# Altium PCB Плата верхняя версия 7 длинная.PcbDoc
Units mm, origin at the board's own origin, x right, y up, seen from the top; angles counter-clockwise.
Board outline 160 x 100 mm, 2 copper layers (Top Layer, Bottom Layer), stack 1.569 mm thick; 118 components, 166 nets, 806 pads, 0 vias.
Unrouted connection lines stored in the file: 550.
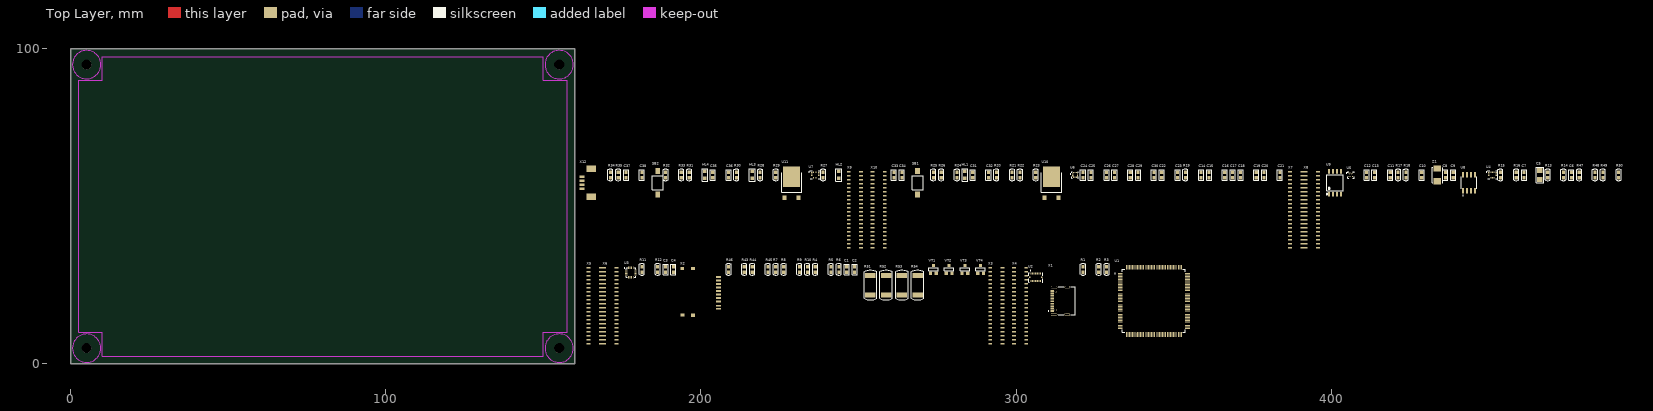
[diagram p0: Top Layer view]
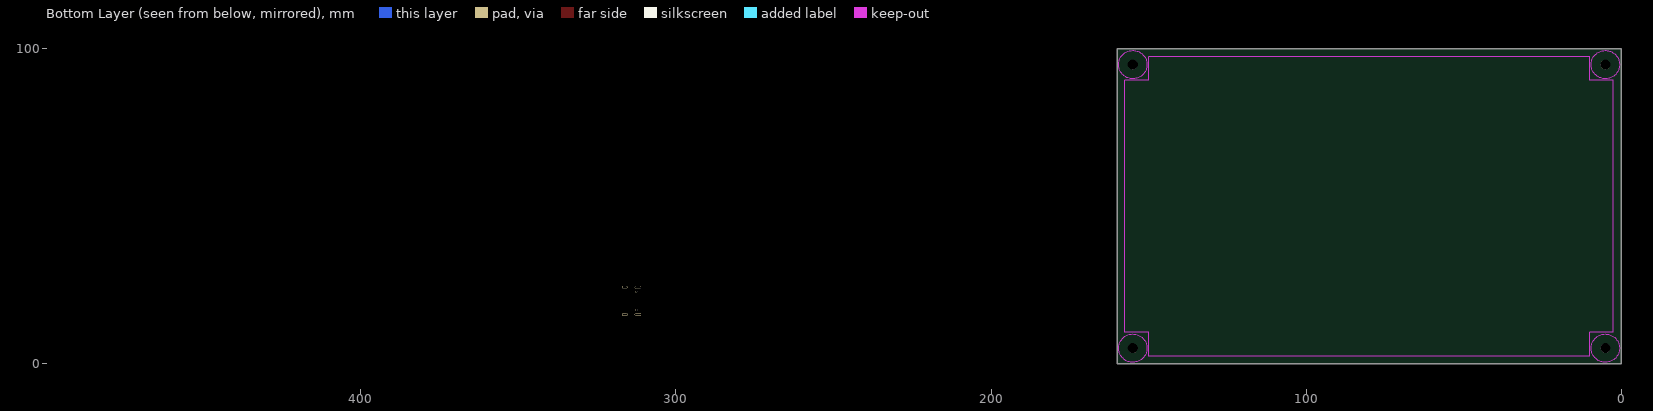
[diagram p1: Bottom Layer view, seen from below]

## Layer stack, top to bottom
Top Solder: solder mask 0.01, Solder Resist, Dk 3.5
Top Layer: signal copper 0.035
Dielectric 1: core 1.4986, Core-043, Dk 4.3
Bottom Layer: signal copper 0.035
Bottom Solder: solder mask 0.01, Solder Resist, Dk 3.5

## Board outline
0,0 0,100 160,100 160,0

## Design rules (kind name [scope] priority, off if disabled: settings)
Clearance [All] p1: gap=0.254 ignorepadtopadclearanceinfootprint=FALSE except(0: Arc-Hole Track-Hole SMDPad-Hole THPad-Hole Via-Hole Fill-Hole Poly-Hole Region-Hole Text-Hole)
PolygonConnect [All] p1: connectstyle=Relief reliefconductorwidth=0.254 reliefentries=4 polygonreliefangle="90 Angle" airgapwidth=0.254
RoutingVias [All] p1: holewidth=0.711 width=1.27 viastyle="Through Hole" minholewidth=0.711 minwidth=1.27 maxholewidth=0.711 maxwidth=1.27
SolderMaskExpansion [All] p1: expansion=0.102 istentingtop=FALSE
Width [All] p1: maxlimit=0.254 minlimit=0.254 preferedwidth=0.254
30 further rules are at their usual default settings.

## Components (designator, comment, footprint, x,y, rotation, side; value= is the part's Value field where it differs from the comment)
C1 "100nF" C0603 246.25,30 r90 top
C2 "100nF" C0603 248.75,30 r90 top
C3 "100nF" C0603 188.75,30 r90 top
C4 "100nF" C0603 191.25,30 r90 top
C5 "4u7F" C1206 466.25,60 r90 top
C6 "100nF" C0603 476.25,60 r90 top
C7 "200nF" C0603 461.25,60 r90 top
C8 "18pF" C0603 436.25,60 r90 top
C9 "18pF" C0603 438.75,60 r90 top
C10 "47nF" C0603 428.75,60 r90 top
C11 "100nF" C0603 418.75,60 r90 top
C12 "100nF" C0603 411.25,60 r90 top
C13 "100nF" C0603 413.75,60 r90 top
C14 "100nF" C0603 358.75,60 r90 top
C15 "100nF" C0603 361.25,60 r90 top
C16 "100nF" C0603 366.25,60 r90 top
C17 "100nF" C0603 368.75,60 r90 top
C18 "100nF" C0603 371.25,60 r90 top
C19 "100nf" C0603 376.25,60 r90 top
C20 "100nF" C0603 378.75,60 r90 top
C21 "100nF" C0603 383.75,60 r90 top
C22 "100nF" C0603 346.25,60 r90 top
C23 "100nF" C0603 351.25,60 r90 top
C24 "100nF" C0603 321.25,60 r90 top
C25 "100nF" C0603 323.75,60 r90 top
C26 "100nF" C0603 328.75,60 r90 top
C27 "100nF" C0603 331.25,60 r90 top
C28 "100nF" C0603 336.25,60 r90 top
C29 "100nF" C0603 338.75,60 r90 top
C30 "100nF" C0603 343.75,60 r90 top
C31 "1uF" C0603 286.25,60 r90 top
C32 "1uF" C0603 291.25,60 r90 top
C33 "100nF" C0603 261.25,60 r90 top
C34 "C1_POSTOYANNYJ" C0603 263.75,60 r90 top
C35 "1uF" C0603 203.75,60 r90 top
C36 "1uF" C0603 208.75,60 r90 top
C37 "C1_POSTOYANNYJ" C0603 176.25,60 r90 top
C38 "100nF" C0603 181.25,60 r90 top
HL1 "t" LD0805 283.75,60 r90 top
HL2 "t" LD0805 243.75,60 r90 top
HL3 "t" LD0805 216.25,60 r90 top
HL4 "t" LD0805 201.25,60 r90 top
R1 "5K1" R0603 321.25,30 r90 top
R2 "100" R0603 326.25,30 r90 top
R3 "100" R0603 328.75,30 r90 top
R4 "100" R0603 236.25,30 r90 top
R5 "100" R0603 241.25,30 r90 top
R6 "5K1" R0603 243.75,30 r90 top
R7 "0" R0603 223.75,30 r90 top
R8 "0" R0603 226.25,30 r90 top
R9 "0" R0603 231.25,30 r90 top
R10 "0" R0603 233.75,30 r90 top
R11 "100K" R0603 181.25,30 r90 top
R12 "100K" R0603 186.25,30 r90 top
R13 "100K" R0603 468.75,60 r90 top
R14 "100K" R0603 473.75,60 r90 top
R15 "10K" R0603 453.75,60 r90 top
R16 "10K" R0603 458.75,60 r90 top
R17 "60" R0603 421.25,60 r90 top
R18 "60" R0603 423.75,60 r90 top
R19 "0" R0603 353.75,60 r90 top
R20 "0" R0603 293.75,60 r90 top
R21 "0" R0603 298.75,60 r90 top
R22 "0" R0603 301.25,60 r90 top
R23 "0" R0603 306.25,60 r90 top
R24 "100" R0603 281.25,60 r90 top
R25 "10K" R0603 273.75,60 r90 top
R26 "10K" R0603 276.25,60 r90 top
R27 "100" R0603 238.75,60 r90 top
R28 "0" R0603 218.75,60 r90 top
R29 "0" R0603 223.75,60 r90 top
R30 "100" R0603 211.25,60 r90 top
R31 "100" R0603 196.25,60 r90 top
R32 "10K" R0603 188.75,60 r90 top
R33 "10K" R0603 193.75,60 r90 top
R34 "0" R0603 171.25,60 r90 top
R35 "0" R0603 173.75,60 r90 top
R43 "10K" R0603 213.75,30 r90 top
R44 "10K" R0603 216.25,30 r90 top
R45 "10K" R0603 221.25,30 r90 top
R46 "10K" R0603 208.75,30 r90 top
R47 "NCP15XH103F03RC" R0603 478.75,60 r90 top
R48 "NCP15XH103F03RC" R0603 483.75,60 r90 top
R49 "NCP15XH103F03RC" R0603 486.25,60 r90 top
R50 "NCP15XH103F03RC" R0603 491.25,60 r90 top
R51 "0020ab 1K8 2512" R2512 253.75,25 r90 top
R52 "0020ab 1K8 2512" R2512 258.75,25 r90 top
R53 "0020ab 1K8 2512" R2512 263.75,25 r90 top
R54 "0020ab 1K8 2512" R2512 268.75,25 r90 top
SB1 "Text" DTSM-32 268.75,57.5 r0 top
SB2 "Text" DTSM-32 186.25,57.5 r0 top
U1 "K1921BK01T2" QFP50P2200X2200X160-144N 343.75,20 r0 top
U2 "BMI088" PQFN50P450X300X100-16N 306.25,27.5 r0 top
U3 "QMC5883L" PLCC16-0.5-3X3MM 176.25,27.5 r0 top
U4 "QMI8658" XDCR_BMI270 451.25,60 r0 top
U5 "BMM150" XDCR_BMM150 406.25,60 r0 top
U6 "BMP388" PQFN50P200X200X80-10N 318.75,60 r0 top
U7 "BMI270" XDCR_BMI270 236.25,60 r0 top
U8 "TJA1040T" SOIC127P600X175-8N 443.75,57.5 r90 top
U9 "W25Q128FVSIG" SOIC127P790X216-8N 401.25,57.5 r90 top
U10 "КФ1158Н" SOT-428 311.25,57.5 r0 top
U11 "КФ1158Н" SOT-428 228.75,57.5 r0 top
VT1 "КТ234В9" SOT-23 273.75,30 r0 top
VT2 "КТ234В9" SOT-23 278.75,30 r0 top
VT3 "MOSFET-N" SOT-23 283.75,30 r0 top
VT4 "КТ234В9" SOT-23 288.75,30 r0 top
X1 "TYPE-C-31-M-12" HRO_TYPE-C-31-M-12 316.25,20 r90 top
X2 "microSD" SD 201.25,22.5 r90 top
X3 "Header 2x20" PBD1.27-40SA 293.75,17.5 r0 top
X4 "Header 2x20" PBD1.27-40SA 301.25,17.5 r0 top
X5 "Header 2x20" PBD1.27-40SA 166.25,17.5 r0 top
X6 "Header 2x20" PBD1.27-40SA 171.25,17.5 r0 top
X7 "Header 2x20" "Headr 2x20 female" 388.75,50 r0 top
X8 "Header 2x20" "Headr 2x20 female" 393.75,50 r0 top
X9 "Header 2x20" "Headr 2x20 female" 248.75,50 r0 top
X10 "Header 2x20" "Headr 2x20 female" 256.25,50 r0 top
X12 "Header 1x4" "PicoBlade 4pin" 163.75,57.5 r90 top
Z1 "KSE-7I08000MAF343ZA3" XTAL_NX5032GA-8.000M-STD-CSU-1 433.75,60 r90 top

## Footprints (in the part's own frame and the unit in brackets; to place one, negate y for a bottom-side part, rotate by r counter-clockwise, add the part's x,y. Pads: shape width x height; smd on the part's side, far side on the other; paste and mask are expansions set on the pad)
C0603 [mm] "1608M"
  rect 1.1x1 smd: 1(-0.85,0) 2(0.85,0)
  silkscreen extent -1.7,-0.8 1.7,0.8, body extent -0.8,-0.4 0.8,0.4, height 0.91
C1206 [mm] "3216M"
  rect 1.6x1.8 smd: 1(-1.4,0) 2(1.4,0)
  silkscreen extent -2.5,-1.2 2.5,1.2, body extent -1.6,-0.8 1.6,0.8, height 1.01
DTSM-32 [mm] "1 contact, Surface, 0.05A, 250V, H=5mm"
  rect 1.5x2 smd: 1(0,3.75) 2(0,-3.75)
  silkscreen extent -1.75,-2.25 1.75,2.25, body extent -1.75,-4 1.75,4, height 5.5
"Headr 2x20 female" [mm]
  rect 1.2x0.45 smd: 1(-1.82,10.962) 2(2.08,10.962) 3(-1.82,9.692) 4(2.08,9.692) 5(-1.82,8.422) 6(2.08,8.422) 7(-1.82,7.152) 8(2.08,7.152) 9(-1.82,5.882) 10(2.08,5.882) 11(-1.82,4.612) 12(2.08,4.612) 13(-1.82,3.342) 14(2.08,3.342) 15(-1.82,2.072) 16(2.08,2.072) 17(-1.82,0.802) 18(2.08,0.802) 19(-1.82,-0.468) 20(2.08,-0.468) 21(-1.82,-1.738) 22(2.08,-1.738) 23(-1.82,-3.008) 24(2.08,-3.008) 25(-1.82,-4.278) 26(2.08,-4.278) 27(-1.82,-5.548) 28(2.08,-5.548) 29(-1.82,-6.818) 30(2.08,-6.818) 31(-1.82,-8.088) 32(2.08,-8.088) 33(-1.82,-9.358) 34(2.08,-9.358) 35(-1.82,-10.628) 36(2.08,-10.628) 37(-1.82,-11.898) 38(2.08,-11.898) 39(-1.82,-13.168) 40(2.08,-13.168)
HRO_TYPE-C-31-M-12 [mm]
  rect 0.6x1.14 smd mask+0.05: A1_B12(-3.2,4.75) A4_B9(-2.4,4.75) B1_A12(3.2,4.75) B4_A9(2.4,4.75)
  rect 0.3x1.14 smd mask+0.05: A5(-1.25,4.75) A6(-0.25,4.75) A7(0.25,4.75) A8(1.25,4.75) B5(1.75,4.75) B6(0.75,4.75) B7(-0.75,4.75) B8(-1.75,4.75)
  oval 0.9x2 hole 0.6 slot 1.7 at 90 deg: S1(-4.325,4.17) S2(4.325,4.17)
  oval 0.9x1.7 hole 0.6 slot 1.4 at 90 deg: S3(-4.325,0) S4(4.325,0)
  round 0.6 hole 0.6 unplated: ""(-2.89,3.68) ""(2.89,3.68)
  silkscreen extent -4.47,-2.6 4.47,6.1, body extent -4.47,-2.6 4.47,5.31, height 3.31
LD0805 [mm]
  rect 1.1x1.1 smd: 1(-1.1,0) 2(1.1,0)
  silkscreen extent -2,-0.9 2,0.9, body extent -1,-0.62 1,0.63, height 0.73
PBD1.27-40SA [mm]
  rect 1.2x0.45 smd: 1(-1.947,12.994) 2(1.953,12.994) 3(-1.947,11.724) 4(1.953,11.724) 5(-1.947,10.454) 6(1.953,10.454) 7(-1.947,9.184) 8(1.953,9.184) 9(-1.947,7.914) 10(1.953,7.914) 11(-1.947,6.644) 12(1.953,6.644) 13(-1.947,5.374) 14(1.953,5.374) 15(-1.947,4.104) 16(1.953,4.104) 17(-1.947,2.834) 18(1.953,2.834) 19(-1.947,1.564) 20(1.953,1.564) 21(-1.947,0.294) 22(1.953,0.294) 23(-1.947,-0.976) 24(1.953,-0.976) 25(-1.947,-2.246) 26(1.953,-2.246) 27(-1.947,-3.516) 28(1.953,-3.516) 29(-1.947,-4.786) 30(1.953,-4.786) 31(-1.947,-6.056) 32(1.953,-6.056) 33(-1.947,-7.326) 34(1.953,-7.326) 35(-1.947,-8.596) 36(1.953,-8.596) 37(-1.947,-9.866) 38(1.953,-9.866) 39(-1.947,-11.136) 40(1.953,-11.136)
"PicoBlade 4pin" [mm]
  rect 0.8x1.6 smd: 1(-1.84,1.525) 2(-0.59,1.525) 3(0.66,1.525) 4(1.91,1.525)
  rect 2.1x3 smd: S(-4.39,-1.375) S(4.46,-1.375)
PLCC16-0.5-3X3MM [mm]
  rect 0.7x0.3 smd: 1(0,2.25) 2(0,1.75) 3(0,1.25) 4(0,0.75) 9(3,0.75) 10(3,1.25) 11(3,1.75) 12(3,2.25)
  rect 0.3x0.7 smd: 5(0.75,0) 6(1.25,0) 7(1.75,0) 8(2.25,0) 13(2.25,3) 14(1.75,3) 15(1.25,3) 16(0.75,3)
  silkscreen extent -0.6,0 3,3
PQFN50P200X200X80-10N [mm]
  rrect9% 0.35x0.38 smd: 1(-0.765,0.25) 2(-0.765,-0.25) 3(-0.5,-0.765) 4(0,-0.765) 5(0.5,-0.765) 6(0.765,-0.25) 7(0.765,0.25) 8(0.5,0.765) 9(0,0.765) 10(-0.5,0.765)
  silkscreen extent -1.6,-1.03 1.03,1.03
PQFN50P450X300X100-16N [mm]
  rect 0.35x0.59 smd: 1(-1.5,1.165) 2(-1,1.165) 3(-0.5,1.165) 4(0,1.165) 5(0.5,1.165) 6(1,1.165) 7(1.5,1.165) 9(1.5,-1.165) 10(1,-1.165) 11(0.5,-1.165) 12(0,-1.165) 13(-0.5,-1.165) 14(-1,-1.165) 15(-1.5,-1.165)
  rect 0.59x0.35 smd: 8(1.915,0) 16(-1.915,0)
  silkscreen extent -2.25,-1.5 2.25,2.2
QFP50P2200X2200X160-144N [mm]
  rrect25% 1.47x0.28 smd: 1(-10.67,8.75) 2(-10.67,8.25) 3(-10.67,7.75) 4(-10.67,7.25) 5(-10.67,6.75) 6(-10.67,6.25) 7(-10.67,5.75) 8(-10.67,5.25) 9(-10.67,4.75) 10(-10.67,4.25) 11(-10.67,3.75) 12(-10.67,3.25) 13(-10.67,2.75) 14(-10.67,2.25) 15(-10.67,1.75) 16(-10.67,1.25) 17(-10.67,0.75) 18(-10.67,0.25) 19(-10.67,-0.25) 20(-10.67,-0.75) 21(-10.67,-1.25) 22(-10.67,-1.75) 23(-10.67,-2.25) 24(-10.67,-2.75) 25(-10.67,-3.25) 26(-10.67,-3.75) 27(-10.67,-4.25) 28(-10.67,-4.75) 29(-10.67,-5.25) 30(-10.67,-5.75) 31(-10.67,-6.25) 32(-10.67,-6.75) 33(-10.67,-7.25) 34(-10.67,-7.75) 35(-10.67,-8.25) 36(-10.67,-8.75) 73(10.67,-8.75) 74(10.67,-8.25) 75(10.67,-7.75) 76(10.67,-7.25) 77(10.67,-6.75) 78(10.67,-6.25) 79(10.67,-5.75) 80(10.67,-5.25) 81(10.67,-4.75) 82(10.67,-4.25) 83(10.67,-3.75) 84(10.67,-3.25) 85(10.67,-2.75) 86(10.67,-2.25) 87(10.67,-1.75) 88(10.67,-1.25) 89(10.67,-0.75) 90(10.67,-0.25) 91(10.67,0.25) 92(10.67,0.75) 93(10.67,1.25) 94(10.67,1.75) 95(10.67,2.25) 96(10.67,2.75) 97(10.67,3.25) 98(10.67,3.75) 99(10.67,4.25) 100(10.67,4.75) 101(10.67,5.25) 102(10.67,5.75) 103(10.67,6.25) 104(10.67,6.75) 105(10.67,7.25) 106(10.67,7.75) 107(10.67,8.25) 108(10.67,8.75)
  rrect25% 0.28x1.47 smd: 37(-8.75,-10.67) 38(-8.25,-10.67) 39(-7.75,-10.67) 40(-7.25,-10.67) 41(-6.75,-10.67) 42(-6.25,-10.67) 43(-5.75,-10.67) 44(-5.25,-10.67) 45(-4.75,-10.67) 46(-4.25,-10.67) 47(-3.75,-10.67) 48(-3.25,-10.67) 49(-2.75,-10.67) 50(-2.25,-10.67) 51(-1.75,-10.67) 52(-1.25,-10.67) 53(-0.75,-10.67) 54(-0.25,-10.67) 55(0.25,-10.67) 56(0.75,-10.67) 57(1.25,-10.67) 58(1.75,-10.67) 59(2.25,-10.67) 60(2.75,-10.67) 61(3.25,-10.67) 62(3.75,-10.67) 63(4.25,-10.67) 64(4.75,-10.67) 65(5.25,-10.67) 66(5.75,-10.67) 67(6.25,-10.67) 68(6.75,-10.67) 69(7.25,-10.67) 70(7.75,-10.67) 71(8.25,-10.67) 72(8.75,-10.67) 109(8.75,10.67) 110(8.25,10.67) 111(7.75,10.67) 112(7.25,10.67) 113(6.75,10.67) 114(6.25,10.67) 115(5.75,10.67) 116(5.25,10.67) 117(4.75,10.67) 118(4.25,10.67) 119(3.75,10.67) 120(3.25,10.67) 121(2.75,10.67) 122(2.25,10.67) 123(1.75,10.67) 124(1.25,10.67) 125(0.75,10.67) 126(0.25,10.67) 127(-0.25,10.67) 128(-0.75,10.67) 129(-1.25,10.67) 130(-1.75,10.67) 131(-2.25,10.67) 132(-2.75,10.67) 133(-3.25,10.67) 134(-3.75,10.67) 135(-4.25,10.67) 136(-4.75,10.67) 137(-5.25,10.67) 138(-5.75,10.67) 139(-6.25,10.67) 140(-6.75,10.67) 141(-7.25,10.67) 142(-7.75,10.67) 143(-8.25,10.67) 144(-8.75,10.67)
  silkscreen extent -12.44,-10 10,10
R0603 [mm] "1608M"
  rect 1.1x1 smd: 1(-0.85,0) 2(0.85,0)
  silkscreen extent -1.8,-0.8 1.8,0.8, body extent -0.8,-0.4 0.8,0.4, height 0.38
R2512 [mm] "6432M"
  rect 1.6x3.3 smd: 1(-3.1,0) 2(3.1,0)
  silkscreen extent -4.7,-2 4.7,2, body extent -3.2,-1.6 3.2,1.6, height 0.7
SD [mm]
  rect 0.5x1.47 smd: 1(-5,-4.325) 2(-4,-4.325)
  rect 0.7x1.47 smd: 3(-2.65,-4.325) 4(-1.55,-4.325) 5(-0.45,-4.325) 6(0.65,-4.325) 7(1.75,-4.325) 8(2.85,-4.325) 9(3.95,-4.325) CD(5.05,-4.325)
  rect 0.98x1.2 smd: S1(-7.05,3.8) S2(7.8,3.8) S3(7.725,7.225) S4(-7,7.15)
SOIC127P600X175-8N [mm]
  rect 1.75x0.59 smd: 1(-2.585,1.905) 2(-2.585,0.635) 3(-2.585,-0.635) 4(-2.585,-1.905) 5(2.585,-1.905) 6(2.585,-0.635) 7(2.585,0.635) 8(2.585,1.905)
  silkscreen extent -4.1,-2.52 1.95,2.52, body extent -3,-2.45 3,2.45, height 1.75
SOIC127P790X216-8N [mm]
  oval 1.6x0.6 smd: 1(-3.6,1.905) 2(-3.6,0.635) 3(-3.6,-0.635) 4(-3.6,-1.905) 5(3.6,-1.905) 6(3.6,-0.635) 7(3.6,0.635) 8(3.6,1.905)
  silkscreen extent -3.82,-2.65 2.47,2.82
SOT-23 [mm] "КТ-46"
  rect 1x1 smd: 1(-0.9,-1.2) 2(0,1.2) 3(0.9,-1.2)
  silkscreen extent -1.5,-0.5 1.5,0.5, body extent -1.5,-1.15 1.5,1.15, height 1.11
SOT-428 [mm] "КТ-89, DPAK, TO-252"
  rect 1.2x1.5 smd: 1(-2.222,-4.763) 3(2.222,-4.763)
  rect 5.5x6.5 smd: 2(0,1.905)
  silkscreen extent -3.17,-3 3.17,3.17, body extent -3.25,-5.28 3.25,4.86, height 2.43
XDCR_BMI270 [mm]
  rect 0.475x0.25 smd: 1(-1.162,0.75) 2(-1.162,0.25) 3(-1.162,-0.25) 4(-1.162,-0.75) 8(1.162,-0.75) 9(1.162,-0.25) 10(1.162,0.25) 11(1.162,0.75)
  rect 0.25x0.475 smd: 5(-0.5,-0.913) 6(0,-0.913) 7(0.5,-0.913) 12(0.5,0.913) 13(0,0.913) 14(-0.5,0.913)
  silkscreen extent -2.07,-1.25 1.5,1.25, body extent -1.5,-1.25 1.5,1.25, height 0.87
XDCR_BMM150 [mm]
  round 0.2 smd: A1(-0.601,0.601) A3(-0.035,0.601) A5(0.531,0.601) B2(-0.318,0.318) B4(0.248,0.318) C1(-0.601,0.035) C5(0.531,0.035) D2(-0.318,-0.248) D4(0.248,-0.248) E1(-0.601,-0.531) E3(-0.035,-0.531) E5(0.531,-0.531)
  silkscreen extent -1.37,-1.02 1.02,1.02
XTAL_NX5032GA-8.000M-STD-CSU-1 [mm]
  rect 2x2.4 smd: 1(-2,0) 2(2,0)
  silkscreen extent -2.5,-1.6 2.5,1.6, body extent -2.5,-1.6 2.5,1.6, height 1.5

## Part data
C1 C2 C3 C4 C5 C6 C7 C8 C9 C10 C11 C12 C13 C14 C15 C16 C17 C18 C19 C20 C21 C22 C23 C24 C25 C26 C27 C28 C29 C30 C31 C32 C33 C35 C36 C38: library part C1_POSTOYANNYJ, "Конденсатор постоянной емкости"
C34 C37: "Конденсатор постоянной емкости"
HL1 HL2 HL3 HL4: library part Led-1, Published=03.12.2013, Publisher="Andrew Danich", Type="Индикатор единичный"
R1 R2 R3 R4 R5 R6 R7 R8 R9 R10 R11 R12 R13 R14 R15 R16 R17 R18 R19 R20 R21 R22 R23 R24 R25 R26 R27 R28 R29 R30 R31 R32 R33 R34 R35: library part R1_POSTOYANNYJ, "Резистор постоянный", Simulation ModelName=Resistors, Simulation PortMap=(1:1),(2:2)
R43 R44 R45 R46: library part Resistor, Published=24.03.2010, Publisher="Andrew Danich", Type=Резистор
R47 R48 R49 R50 R51 R52 R53 R54: library part Resistor_0,25W, Published=19.09.2014, Publisher="Andrew Danich", Type=Резистор
SB1 SB2: library part BT-01x-01p-LED, Published=17.04.2014, Publisher="Andrew Danich", Type=Переключатель
U1: "MCU"
U2 U4: "IMU"
U3 U5: "Compass"
U6: "Barometer"
U7: library part QMI8658, "IMU"
U8: "CAN-Transciever"
U9: "Memory 4MB"
U10 U11: "LDO"
VT1 VT2 VT4: library part MOSFET-N, Published=24.09.2010, Publisher="Andrew Danich", Type=Транзистор
X2: library part MICROSD, "Описание свойств компонента"
Z1: library part KX-38T
VT3: Published=24.09.2010, Publisher="Andrew Danich", Type=Транзистор

## Free pads (board coordinates)
  round 3 hole 3.2 unplated: MTH1(5,5) MTH2(5,95) MTH3(155,95) MTH4(155,5)

## Nets (pads, with @x,y where several pads share a name; then routed paths per layer and width w, separated by ;. In a path a pad name is that pad's centre, name@x,y a point inside that pad or via, vN(x,y) a via of type N, cw(c..) or ccw(c..) an arc to the next point about the centre after c; other vN are vias at no path point)
3V3: C6.1 C14.2 C15.2 C16.2 C17.2 C18.2 C19.2 C20.2 C21.1 C24.1 C25.1 C26.1 C27.1 C28.1 C29.1 C30.1 C36.2 R11.1 R12.1 R13.1 R14.2 R25.2 R26.2 R30.1 R32.2 R33.2 R43.2 R44.2 R45.2 R46.2 U1.6 U1.17 U1.30 U1.32 U1.33 U1.39 U1.52 U1.62 U1.72 U1.84 U1.95 U1.108 U1.121 U1.131 U1.144 U9.8 U11.3 X2.4 X3.9 X3.10 X6.31 X6.32 X7.9 X7.10 X10.31 X10.32 X12.1
3V3_SENSOR: C1.1 C2.1 C3.1 C4.1 C12.1 C13.1 C22.1 C23.1 C32.2 C33.1 C34.1 C37.1 C38.1 R15.1 R16.1 R31.1 U2.3 U2.11 U3.2 U3.13 U4.5 U4.8 U5.B2 U5.E5 U6.1 U6.10 U7.5 U7.8 U10.3
4V2: X3.11 X3.12 X3.13 X3.14 X6.27 X6.28 X6.29 X6.30 X7.11 X7.12 X7.13 X7.14 X10.27 X10.28 X10.29 X10.30
5V: C11.1 C31.2 C35.2 U8.3 U10.1 U11.1 X3.7 X3.8 X6.33 X6.34 X7.7 X7.8 X10.33 X10.34
GND: C1.2 C2.2 C3.2 C4.2 C5.1 C6.2 C8.1 C9.1 C10.1 C11.2 C12.2 C13.2 C14.1 C15.1 C16.1 C17.1 C18.1 C19.1 C20.1 C21.2 C22.2 C23.2 C24.2 C25.2 C26.2 C27.2 C28.2 C29.2 C30.2 C31.1 C32.1 C33.2 C34.2 C35.1 C36.1 C37.2 C38.2 HL1.2 HL2.2 HL3.2 HL4.2 R1.2 R6.2 R19.1 R28.1 R29.1 R34.1 R35.1 R47.2 R48.2 R49.2 R50.2 R51.2 R52.2 R53.2 R54.2 U1.16 U1.38 U1.51 U1.61 U1.83 U1.94 U1.107 U1.120 U1.130 U2.2 U2.4 U2.6 U2.7 U3.4 U3.9 U3.11 U4.6 U4.7 U5.A1 U5.C5 U5.E1 U5.E3 U6.3 U6.8 U6.9 U7.6 U7.7 U8.2 U8.8 U9.4 U10.2 U11.2 X1.A1_B12 X1.B1_A12 X2.6 X2.S1 X2.S2 X3.37 X3.38 X3.39 X3.40 X4.1 X4.2 X4.3 X4.4 X4.5 X4.6 X4.37 X4.38 X4.39 X4.40 X5.1 X5.2 X5.3 X5.4 X5.35 X5.36 X5.37 X5.38 X5.39 X5.40 X6.1 X6.2 X6.3 X6.4 X7.37 X7.38 X7.39 X7.40 X8.1 X8.2 X8.3 X8.4 X8.5 X8.6 X8.37 X8.38 X8.39 X8.40 X9.1 X9.2 X9.3 X9.4 X9.35 X9.36 X9.37 X9.38 X9.39 X9.40 X10.1 X10.2 X10.3 X10.4 X12.4
NetC5_2: C5.2 U3.10
NetC7_1: C7.1 U3.12
NetC7_2: C7.2 U3.8
NetC8_2: C8.2 U1.24 Z1.2
NetC9_2: C9.2 U1.23 Z1.1
NetC10_2: C10.2 R17.2 R18.1 U8.5
NetHL1_1: HL1.1 R24.2
NetHL2_1: HL2.1 R27.2
NetHL3_1: HL3.1 R30.2
NetHL4_1: HL4.1 R31.2
NetR1_1: R1.1 X1.A5
NetR2_1: R2.1 X1.A6
NetR2_2: R2.2 R5.2 U1.104
NetR3_1: R3.1 X1.A7
NetR3_2: R3.2 R4.2 U1.103
NetR4_1: R4.1 X1.B7
NetR5_1: R5.1 X1.B6
NetR6_1: R6.1 X1.B5
NetR7_1: R7.1 R9.2 R20.1 R22.2 U1.132 X6.24 X10.24
NetR7_2: R7.2 X3.36
NetR8_1: R8.1 X3.34
NetR8_2: R8.2 R10.2 R21.2 R23.2 U1.124 X6.22 X10.22
NetR9_1: R9.1 X3.32
NetR10_1: R10.1 X3.30
NetR11_2: R11.2 U1.98 X2.7
NetR12_2: R12.2 U1.100 X2.8
NetR13_2: R13.2 U1.112 X2.2
NetR14_1: R14.1 U1.101 X2.1
NetR15_2: R15.2 U1.11 U3.16 X5.11 X9.11
NetR16_2: R16.2 U1.10 U3.1 X5.9 X9.9
NetR17_1: R17.1 U8.7 X4.24 X8.24
NetR18_2: R18.2 U8.6 X4.26 X8.26
NetR19_2: R19.2 U1.31 X5.32 X9.32
NetR20_2: R20.2 X7.36
NetR21_1: R21.1 X7.34
NetR22_1: R22.1 X7.32
NetR23_1: R23.1 X7.30
NetR24_1: R24.1 U1.56
NetR25_1: R25.1 R28.2 SB1.1 U1.138
NetR26_1: R26.1 R29.2 SB1.2
NetR27_1: R27.1 U1.57
NetR32_1: R32.1 R34.2 SB2.1 U1.25
NetR33_1: R33.1 R35.2 SB2.2
NetR43_1: R43.1 R48.1 U1.50
NetR44_1: R44.1 R49.1 U1.49
NetR45_1: R45.1 R50.1 U1.22
NetR46_1: R46.1 R47.1 U1.53
NetR51_1: R51.1 VT1.2
NetR52_1: R52.1 VT2.2
NetR53_1: R53.1 VT3.2
NetR54_1: R54.1 VT4.2
NetU1_1: U1.1 X5.10 X9.10
NetU1_2: U1.2 X5.12 X9.12
NetU1_3: U1.3 X5.14 X9.14
NetU1_4: U1.4 X6.5 X10.5
NetU1_5: U1.5 X6.7 X10.7
NetU1_12: U1.12 X3.24 X7.24
NetU1_13: U1.13 X5.24 X9.24
NetU1_14: U1.14 X5.26 X9.26
NetU1_15: U1.15 X6.15 X10.15
NetU1_18: U1.18 X6.17 X10.17
NetU1_19: U1.19 X4.25 X8.25
NetU1_20: U1.20 X4.27 X8.27
NetU1_21: U1.21 X4.29 X8.29
NetU1_27: U1.27 X3.20 X7.20
NetU1_28: U1.28 X3.18 X7.18
NetU1_29: U1.29 X5.28 X9.28
NetU1_34: U1.34 X5.23 X9.23
NetU1_35: U1.35 X4.15 X8.15
NetU1_36: U1.36 X3.19 X7.19
NetU1_37: U1.37 X3.17 X7.17
NetU1_40: U1.40 U1.127 U2.14
NetU1_41: U1.41 U2.8 U4.13 U5.A3 U6.2 U7.13 X3.29 X7.29
NetU1_42: U1.42 X2.3
NetU1_43: U1.43 X4.17 X8.17
NetU1_44: U1.44 X5.30 X9.30
NetU1_46: U1.46 X4.19 X8.19
NetU1_47: U1.47 X4.21 X8.21
NetU1_48: U1.48 X2.5
NetU1_58: U1.58 X6.9 X10.9
NetU1_59: U1.59 X6.11 X10.11
NetU1_60: U1.60 X4.7 X8.7
NetU1_64: U1.64 X4.9 X8.9
NetU1_66: U1.66 X4.11 X8.11
NetU1_67: U1.67 X4.13 X8.13
NetU1_69: U1.69 X3.22 X7.22
NetU1_70: U1.70 X6.10 X10.10
NetU1_73: U1.73 U8.4
NetU1_74: U1.74 U8.1
NetU1_75: U1.75 X6.16 X10.16
NetU1_77: U1.77 X6.12 X10.12
NetU1_80: U1.80 X6.14 X10.14
NetU1_85: U1.85 U9.5
NetU1_86: U1.86 U9.2
NetU1_87: U1.87 VT1.3
NetU1_88: U1.88 VT2.3
NetU1_89: U1.89 VT3.3
NetU1_90: U1.90 VT4.3
NetU1_93: U1.93 U7.12
NetU1_109: U1.109 X12.2
NetU1_110: U1.110 X12.3
NetU1_111: U1.111 X5.25 X9.25
NetU1_113: U1.113 X4.30 X8.30
NetU1_114: U1.114 U9.3
NetU1_115: U1.115 U9.7
NetU1_116: U1.116 X4.28 X8.28
NetU1_117: U1.117 U9.6
NetU1_123: U1.123 U9.1
NetU1_125: U1.125 U6.6
NetU1_126: U1.126 U2.5
NetU1_128: U1.128 U4.12
NetU1_129: U1.129 U5.A5
NetU1_134: U1.134 U2.10 U2.15 U4.1 U5.C1 U6.5 U7.1 X3.25 X7.25
NetU1_135: U1.135 U2.9 U4.14 U5.B4 U6.4 U7.14 X3.27 X7.27
NetU1_136: U1.136 X5.29 X9.29
NetU1_137: U1.137 X5.27 X9.27
NetU1_139: U1.139 X4.23 X8.23
NetU1_140: U1.140 X4.31 X8.31
NetU1_141: U1.141 X5.6 X9.6
NetU1_142: U1.142 X5.8 X9.8
NetX3_15: X3.15 X7.15
NetX3_16: X3.16 X7.16
NetX3_21: X3.21 X7.21
NetX3_23: X3.23 X7.23
NetX3_26: X3.26 X7.26
NetX3_28: X3.28 X7.28
NetX3_31: X3.31 X7.31
NetX3_33: X3.33 X7.33
NetX4_20: X4.20 X8.20
NetX4_22: X4.22 X8.22
NetX4_32: X4.32 X8.32
NetX4_33: X4.33 X8.33
NetX4_34: X4.34 X8.34
NetX4_35: X4.35 X8.35
NetX4_36: X4.36 X8.36
NetX5_5: X5.5 X9.5
NetX5_7: X5.7 X9.7
NetX5_13: X5.13 X9.13
NetX5_15: X5.15 X9.15
NetX5_16: X5.16 X9.16
NetX5_17: X5.17 X9.17
NetX5_18: X5.18 X9.18
NetX5_19: X5.19 X9.19
NetX5_20: X5.20 X9.20
NetX5_21: X5.21 X9.21
NetX5_22: X5.22 X9.22
NetX5_31: X5.31 X9.31
NetX5_33: X5.33 X9.33
NetX5_34: X5.34 X9.34
NetX6_6: X6.6 X10.6
NetX6_8: X6.8 X10.8
NetX6_13: X6.13 X10.13
NetX6_18: X6.18 X10.18
NetX6_19: X6.19 X10.19
NetX6_20: X6.20 X10.20
NetX6_21: X6.21 X10.21
NetX6_23: X6.23 X10.23
NetX6_25: X6.25 X10.25
NetX6_26: X6.26 X10.26
VBUS: X1.A4_B9 X1.B4_A9
VCC: VT1.1 VT2.1 VT3.1 VT4.1 X3.1 X3.2 X3.3 X3.4 X3.5 X3.6 X6.35 X6.36 X6.37 X6.38 X6.39 X6.40 X7.1 X7.2 X7.3 X7.4 X7.5 X7.6 X10.35 X10.36 X10.37 X10.38 X10.39 X10.40
pads on no net: U1.7 U1.8 U1.9 U1.26 U1.45 U1.54 U1.55 U1.63 U1.65 U1.68 U1.71 U1.76 U1.78 U1.79 U1.81 U1.82 U1.91 U1.92 U1.96 U1.97 U1.99 U1.102 U1.105 U1.106 U1.118 U1.119 U1.122 U1.133 U1.143 U2.1 U2.12 U2.13 U2.16 U3.3 U3.5 U3.6 U3.7 U3.14 U3.15 U4.2 U4.3 U4.4 U4.9 U4.10 U4.11 U5.D2 U5.D4 U6.7 U7.2 U7.3 U7.4 U7.9 U7.10 U7.11 X1. X1.A8 X1.B8 X1.S1 X1.S2 X1.S3 X1.S4 X2.9 X2.CD X2.S3 X2.S4 X3.35 X4.8 X4.10 X4.12 X4.14 X4.16 X4.18 X7.35 X8.8 X8.10 X8.12 X8.14 X8.16 X8.18 X12.S

## Keep-outs
Keep-Out Layer:
  circle w0.25: c5,95 r4.5
  circle w0.25: c155,95 r4.5
  circle w0.25: c155,5 r4.5
  circle w0.25: c5,5 r4.5
  lines w0.254: 2.5,10 2.5,90 10,90 10,97.5 150,97.5 150,90 157.5,90 157.5,10 150,10 150,2.5 10,2.5 10,10 2.5,10

## Silkscreen, mask and mechanical layers (free items; w line width, h text height)
Board Outline:
  the board outline again, w0.25

## Dimensions
155,95 to 171.075,107.95 on Board Dimensions
160,100 to 160,0 on Board Dimensions
0,100 to 160,100 on Board Dimensions

## Text inside footprints (layer, text, board x,y; h text height)
X1: Top Assembly "PCB EDGE" at 318.15,25.2 h0.61 r90